# Altium PCB wearable.PcbDoc
Units mil, origin at the board's own origin, x right, y up, seen from the top; angles counter-clockwise.
Board outline 1357.64 x 1399.74 mil, 4 copper layers (TOP, GND, PWR, BOT), stack 23.756 mil thick; 38 components, 29 nets, 169 pads, 34 vias.
Unrouted connection lines stored in the file: 1.
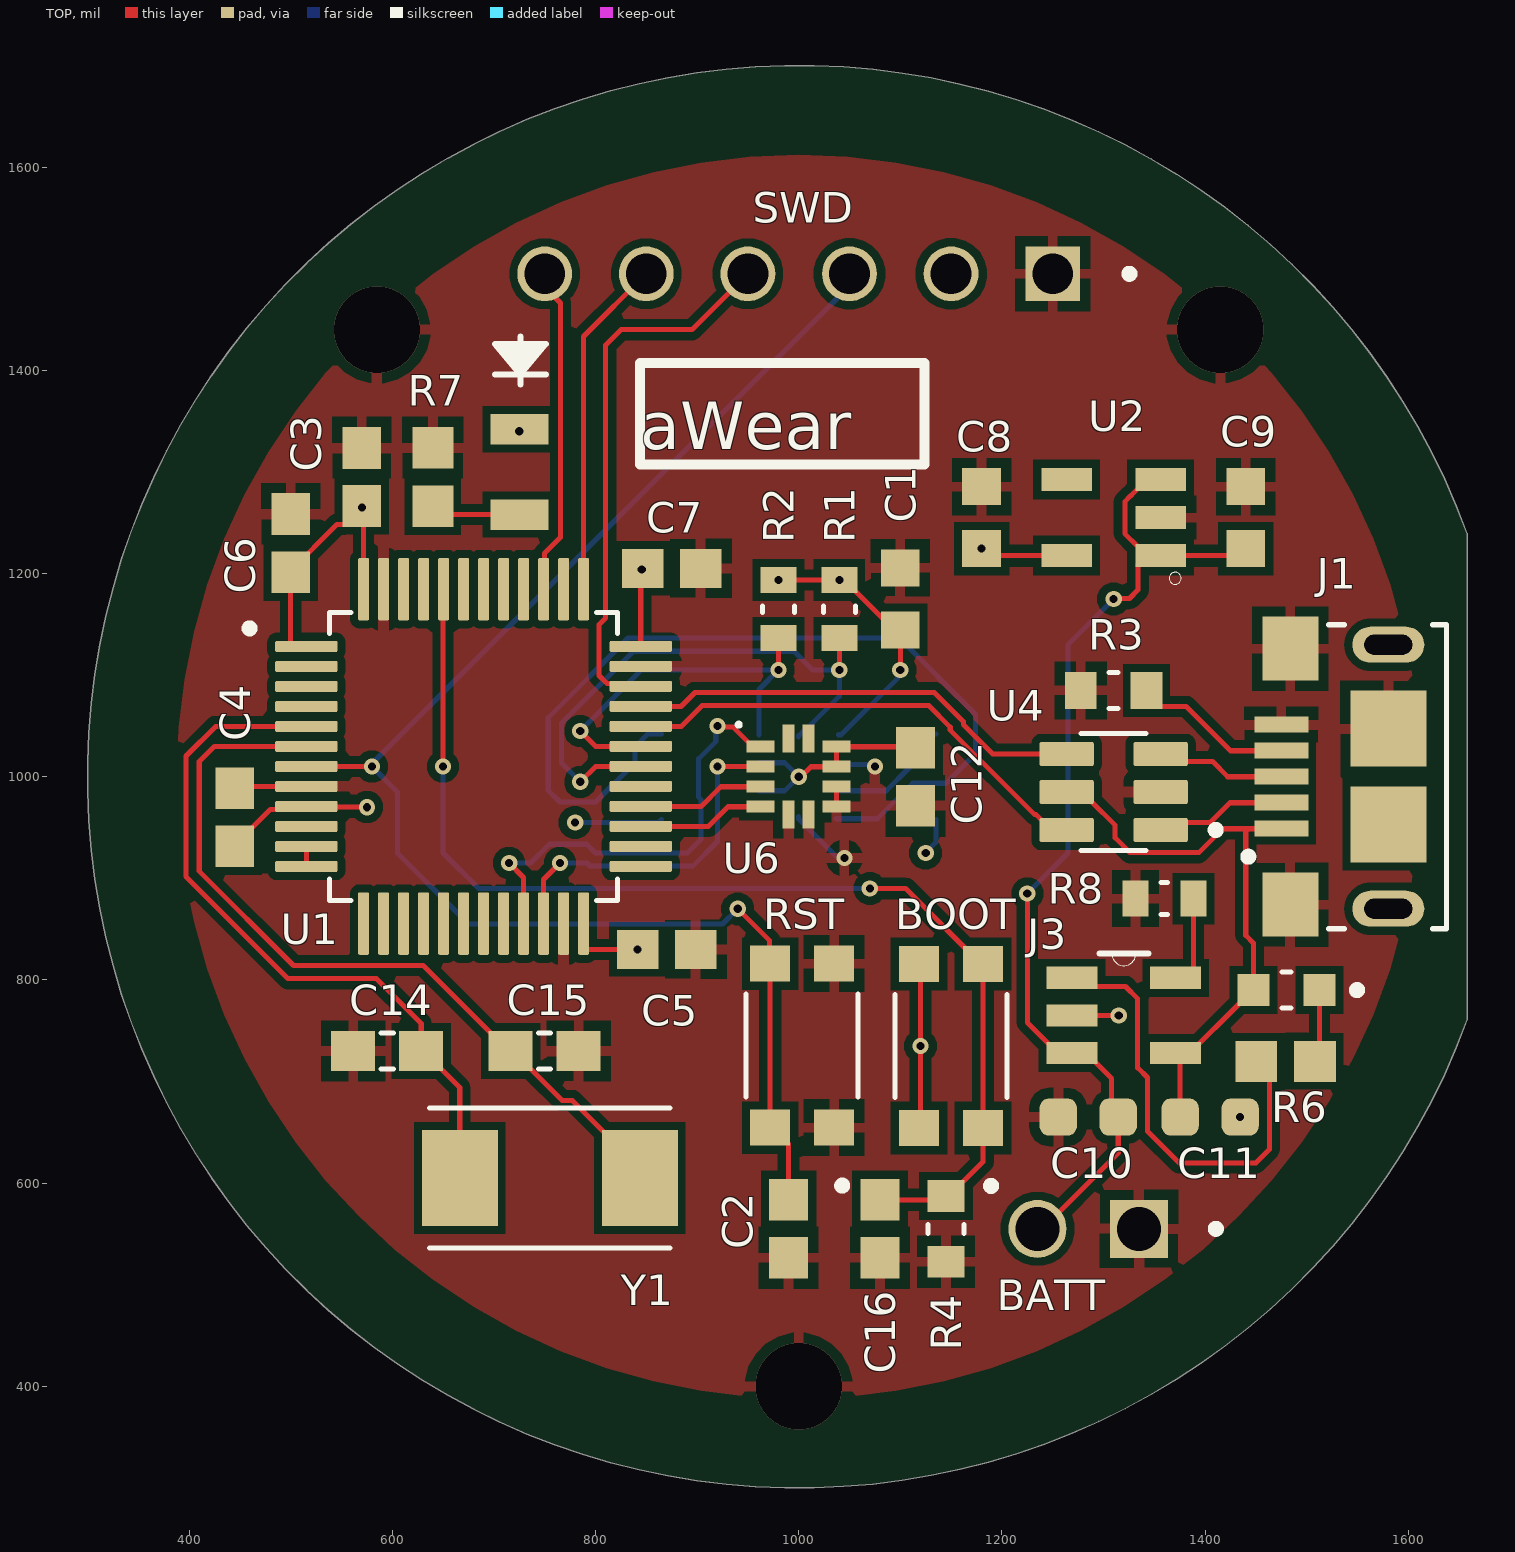
[diagram p0: TOP view]
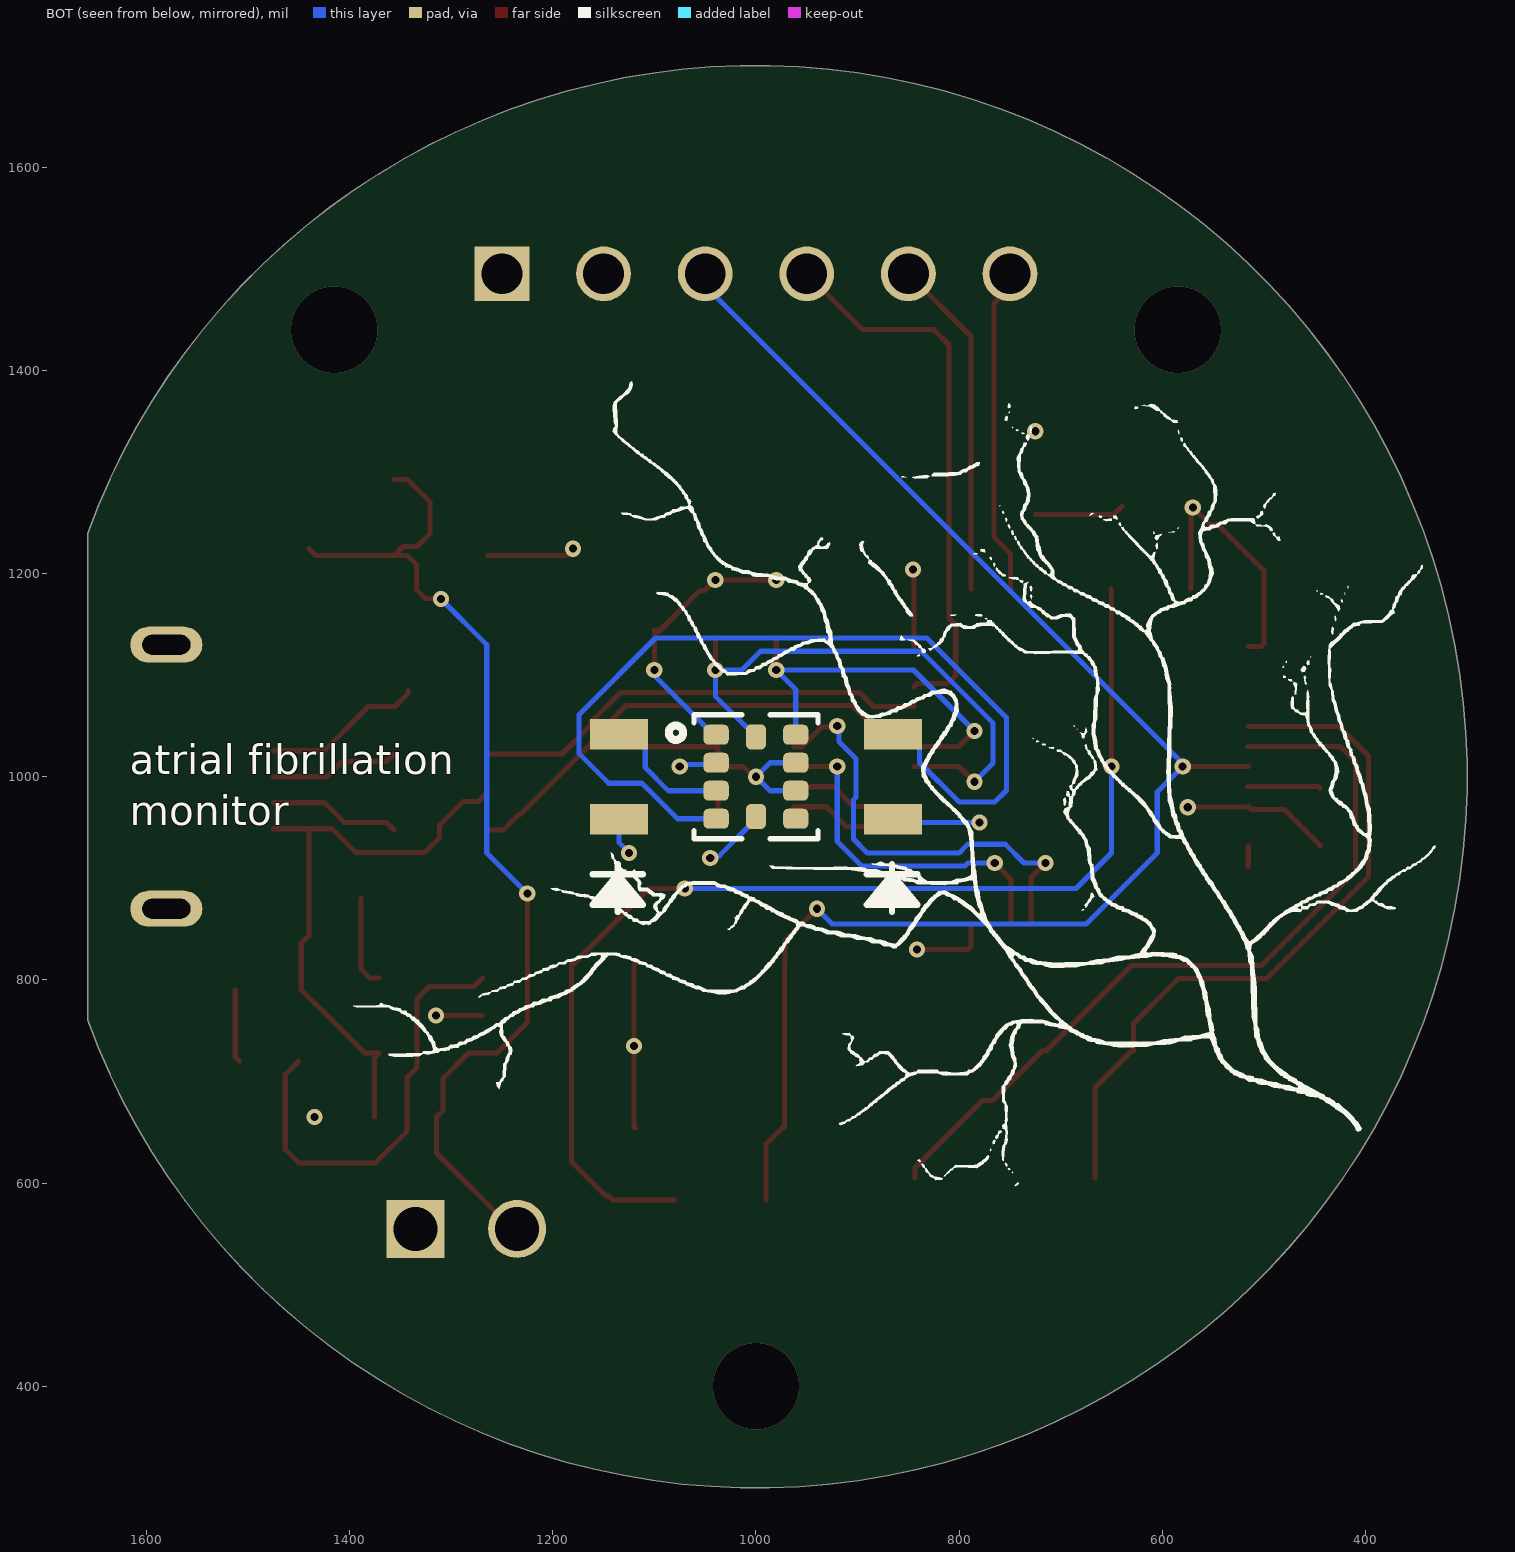
[diagram p1: BOT view, seen from below]
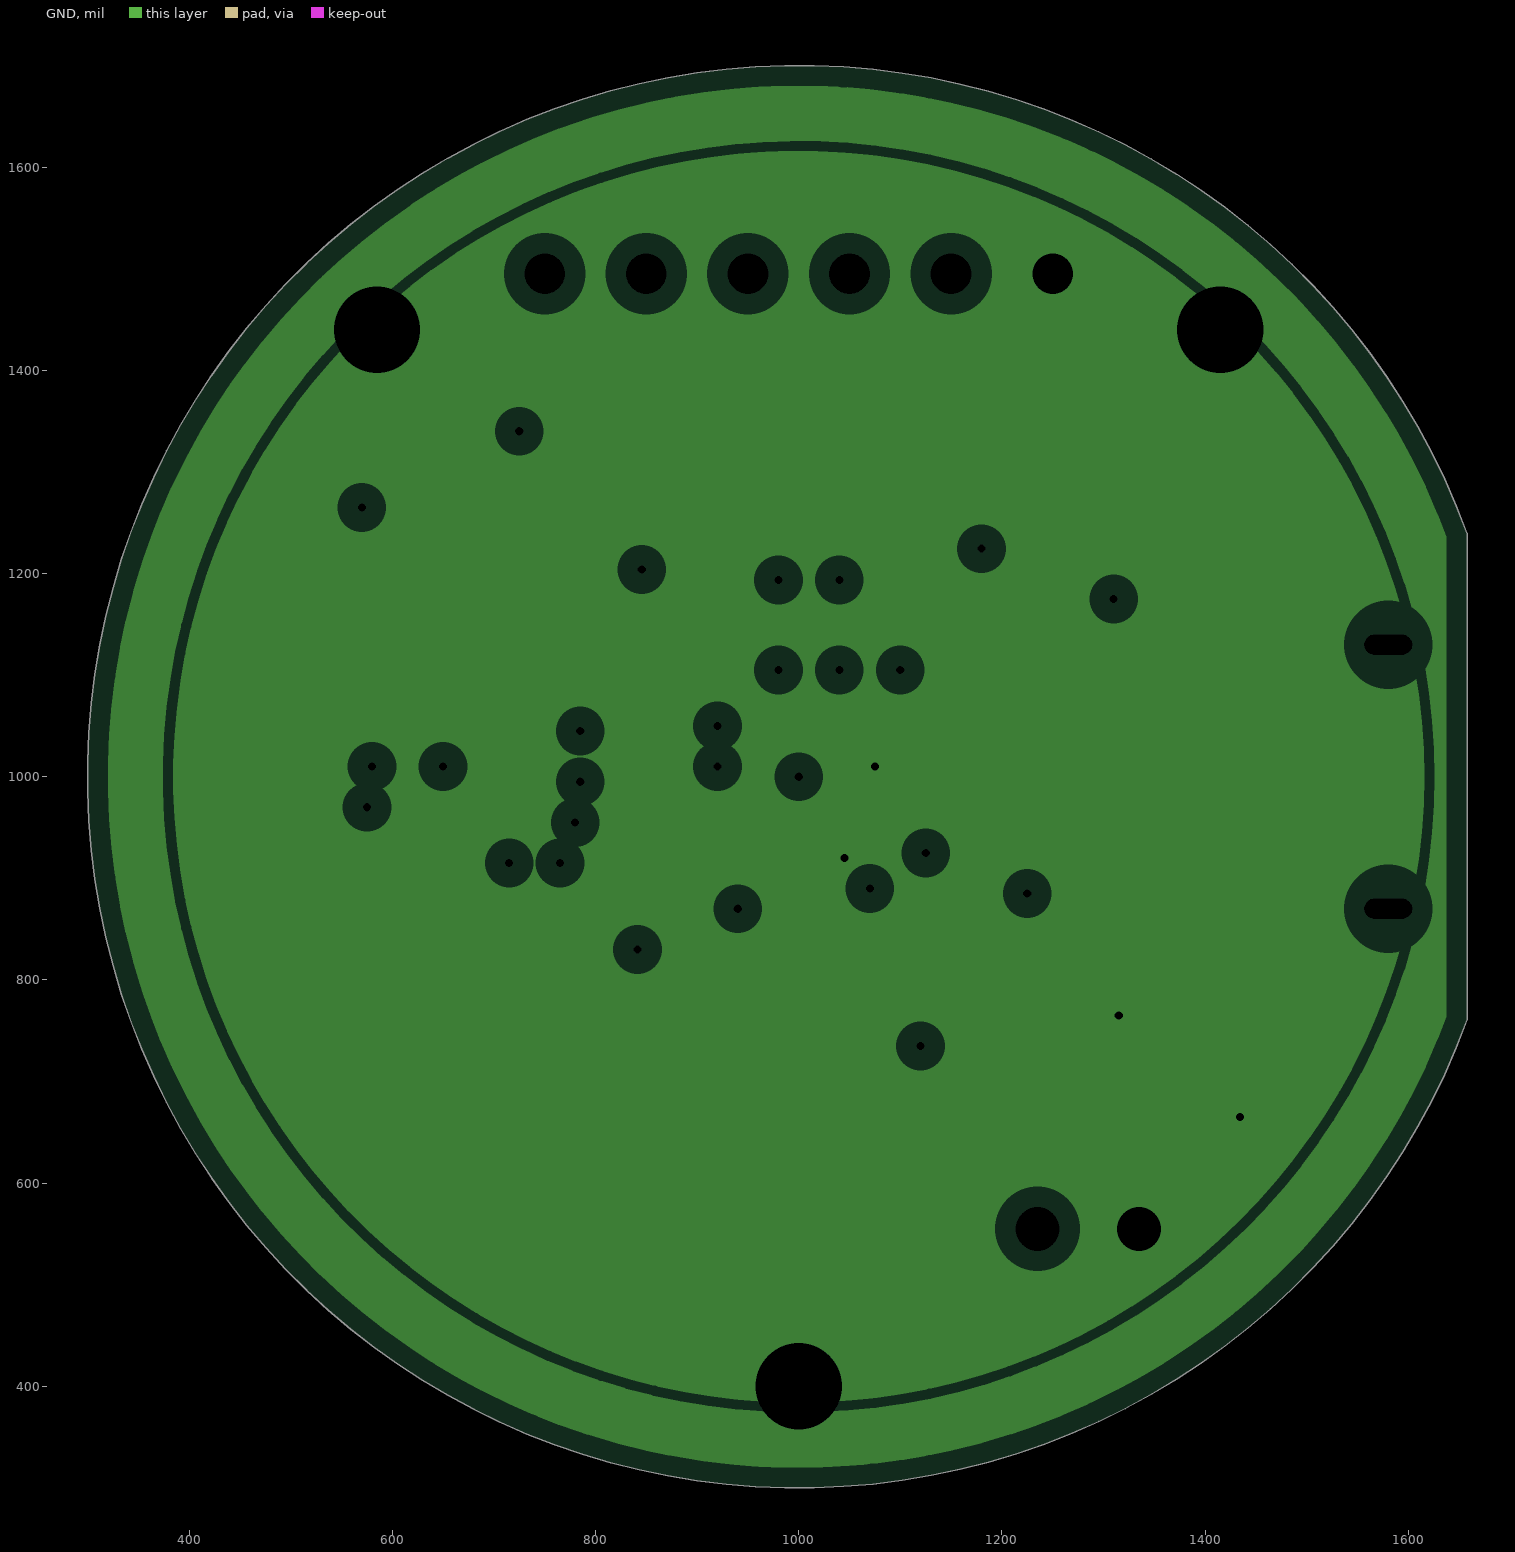
[diagram p2: GND, clearances drawn from the general rule]
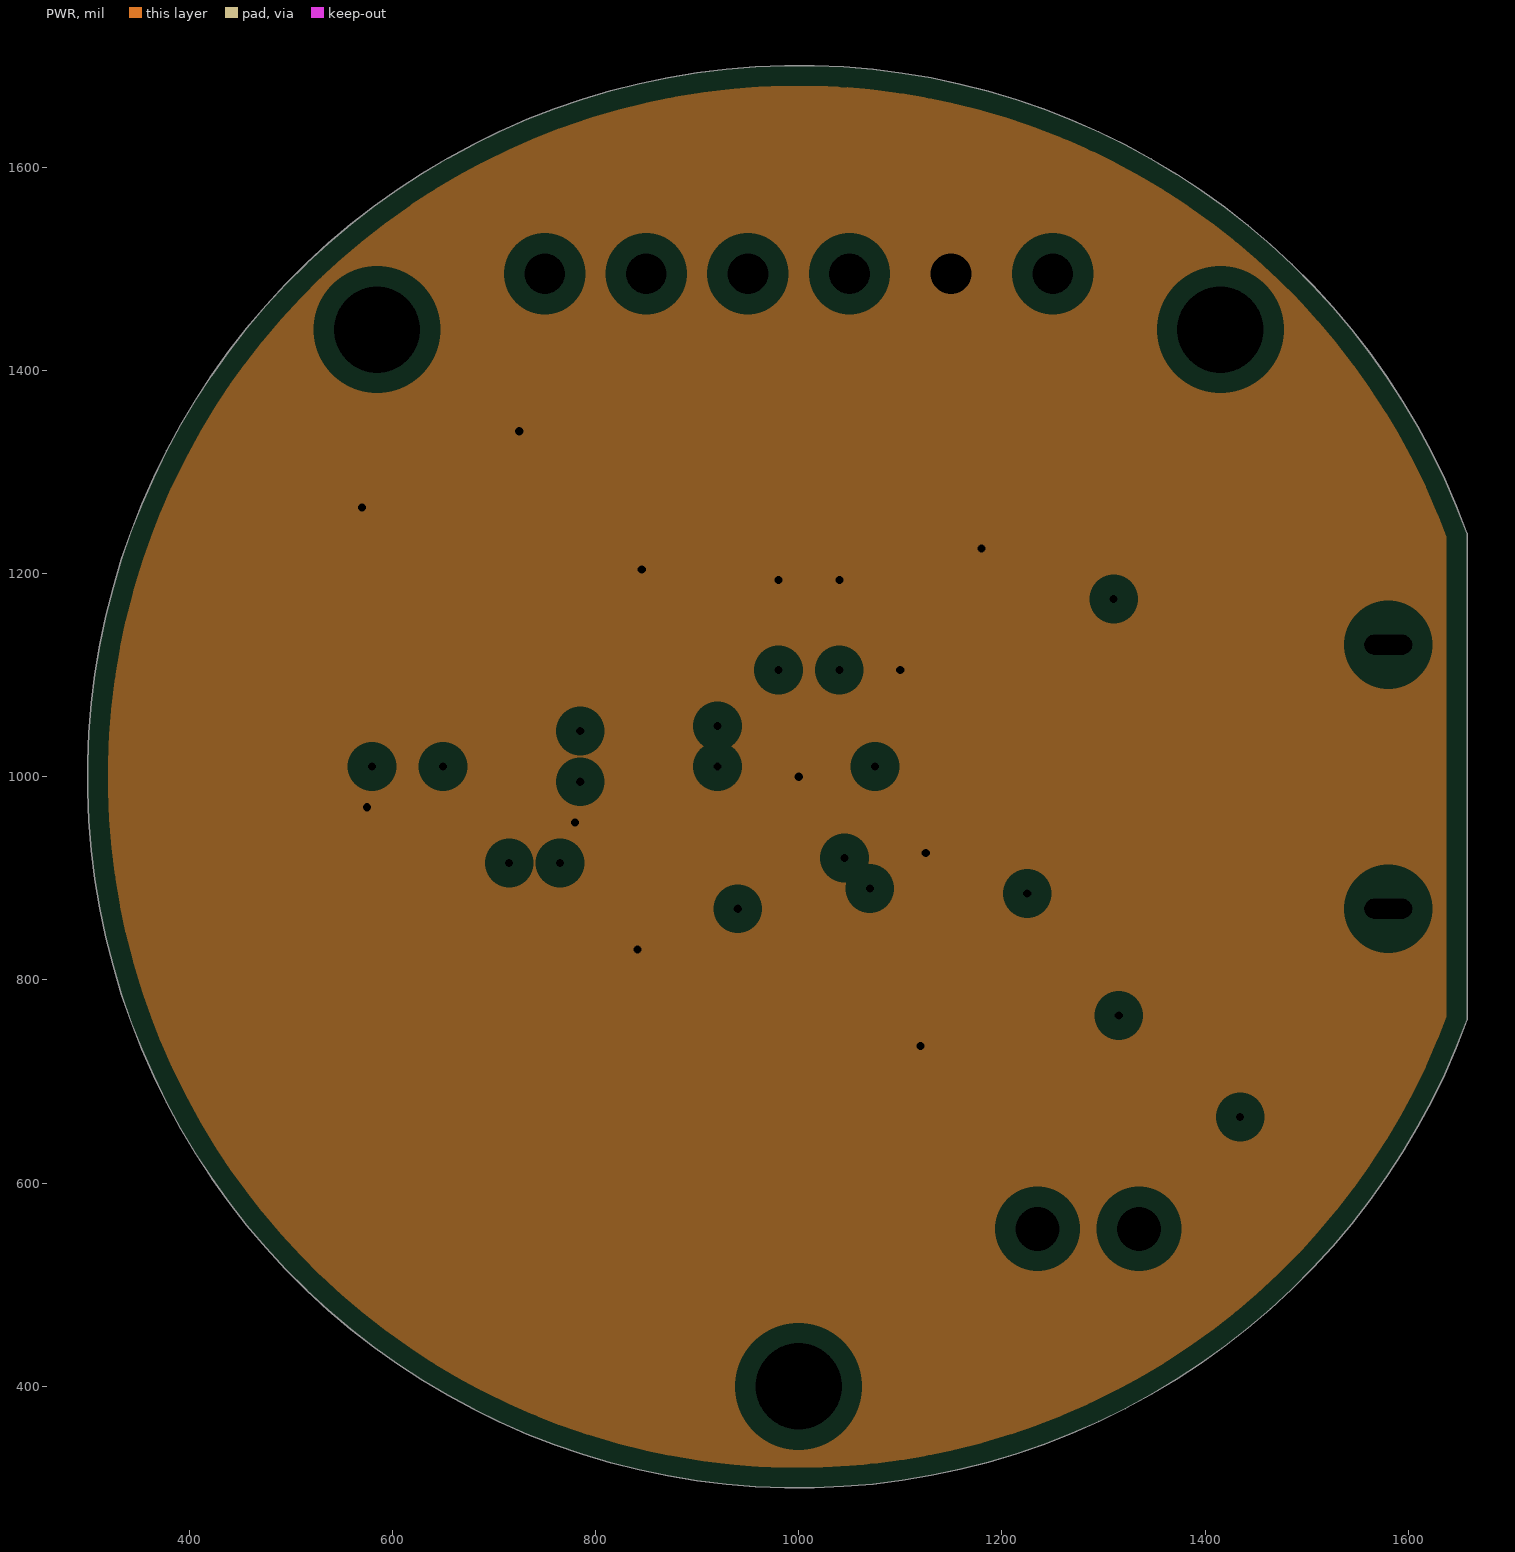
[diagram p3: PWR, clearances drawn from the general rule]

## Layer stack, top to bottom
Top Solder: solder mask 0.4, Solder Resist, Dk 3.5
TOP: signal copper 1.4
Dielectric 2: prepreg 2.8, PP-006, Dk 4.1
GND: plane copper 1.378, net GND
Dielectric 1: dielectric 12.6, FR-4, Dk 4.8
PWR: plane copper 1.378, net +3
Dielectric 3: prepreg 2.8, PP-006, Dk 4.1
BOT: signal copper 1.4
Bottom Solder: solder mask 0.4, Solder Resist, Dk 3.5

## Board outline
1657.78,760.59 cw(c1000,1000) 1657.78,1239.41

## Design rules (kind name [scope] priority, off if disabled: settings)
Clearance [All] p1: gap=8 ignorepadtopadclearanceinfootprint=TRUE except(5: SMDPad-SMDPad)
DiffPairsRouting [All] p1: maxlimit=10 minlimit=10 mostfreqgap=10 toplayer_minwidth=5 toplayer_maxwidth=15 toplayer_prefwidth=15 bottomlayer_minwidth=5 bottomlayer_maxwidth=15 bottomlayer_prefwidth=15 maxuncoupledlength=500
PlaneClearance [All] p1: clearance=20
PlaneConnect [All] p1: planeconnectstyle=Relief reliefexpansion=20 reliefentries=4 reliefconductorwidth=10 reliefairgap=10
PolygonConnect [All] p1: connectstyle=Relief reliefconductorwidth=10 reliefentries=4 polygonreliefangle="90 Angle" airgapwidth=10
RoutingVias [All] p1: holewidth=28 width=50 viastyle="Through Hole" minholewidth=28 minwidth=50 maxholewidth=28 maxwidth=50
SolderMaskExpansion [All] p1: expansion=4 istentingtop=FALSE
Width [All] p1: maxlimit=100 minlimit=5 preferedwidth=10
27 further rules are at their usual default settings.

## Classes and differential pairs
component class wearable: BOOT C1 C2 C3 C4 C5 C6 C7 C8 C9 C10 C11 C12 C14 C15 C16 J1 J3 R1 R2 R3 R4 R6 R7 R8 RST U1 U2 U4 U6 Y1
differential pair D: +D_P -D_N

## Components (designator, comment, footprint, x,y, rotation, side; value= is the part's Value field where it differs from the comment)
BATT "61300211121" WURTH_61300211121 1285,555 r180 top
BOOT "TL6330AF200Q" SW_TL6330AF200Q 1150,735 r90 top
C1 "1uF" CAPC1608X90N 1100,1175 r90 top
C2 "100 nF" CAPC1608X87N 990,555 r90 top
C3 "100 nF" CAPC1608X87N 570,1295 r270 top
C4 "100 nF" CAPC1608X87N 445,960 r270 top
C5 "100 nF" CAPC1608X87N 870,830 r180 top
C6 "100 nF" CAPC1608X87N 500,1230 r270 top
C7 "100 nF" CAPC1608X87N 875,1205 r180 top
C8 "1uF" CAPC1608X90N 1180,1255 r90 top
C9 "1uF" CAPC1608X90N 1440,1255 r90 top
C10 "4.7 uF" 0603-CAPC1608X9N 1285,665 r0 top
C11 "4.7 uF" 0603-CAPC1608X9N 1405,665 r180 top
C12 "100 nF" CAPC1608X87N 1115,1000 r90 top
C14 "18pF" CAPC1608X90 595,730 r180 top
C15 "18pF" CAPC1608X90 750,730 r0 top
C16 "100 nF" CAPC1608X87N 1080,555 r90 top
J1 "micro" FCI_10118193-0001LF 1580.32,1000 r90 top
J3 "MCP73831T-2ACI/OT" SOT95P280X145-5N 1320,765 r0 top
LED1 "right" LED_CMD17-21VGD_TR8 1135,1000 r90 bottom
LED2 "left" LED_CMD17-21VGD_TR8 865,1000 r90 bottom
LED3 "GOOD" LED_CMD17-21VGD_TR8 725,1300 r270 top
R1 "4.7k" RES_ERJPA3D4701V 1040,1165 r90 top
R2 "4.7k" RES_ERJPA3D4701V 980,1165 r90 top
R3 "100k" RESC1608X55N 1310,1085 r0 top
R4 "100k" RESC1608X55N 1145,555 r90 top
R6 "330R" RESC1607X60N 1479.21,719.81 r0 top
R7 "330R" RESC1607X60N 640,1295 r270 top
R8 "2k" RES_ERJS03F2001V 1360,880 r180 top
RST "TL6330AF200Q" SW_TL6330AF200Q 1003.39,735.31 r90 top
SWD "640456-6" TE_640456-6 1250,1495 r0 top
U1 "STM32L433CCT6" QFP50P900X900X160-48N 680,1020 r0 top
U2 "STLQ015M30R" SOT23P95_280X145-5N 1310,1255 r180 top
U3 "BH1790GLC-E2" PQFN70P280X280X100-10N 1000,1000 r180 bottom
U4 "USBLC6-2SC6Y" SOT95P280X145-6N 1310,985 r180 top
U6 "LIS2DE12TR" QFN50P200X200X100-12N 1000,1000 r0 top
Y1 "8MHz" XTAL_ECS-080-18-23G-JGN-TR 755,605 r0 top
? "STATUS" LED_SML-D12Y1WT86 1480,790 r180 top

## Footprints (in the part's own frame and the unit in brackets; to place one, negate y for a bottom-side part, rotate by r counter-clockwise, add the part's x,y. Pads: shape width x height; smd on the part's side, far side on the other; paste and mask are expansions set on the pad)
0603-CAPC1608X9N [mm]
  rrect50% 0.93x0.93 smd: 1(-0.75,0) 2(0.75,0)
  body extent -0.8,-0.4 0.8,0.4, height 0.9
CAPC1608X87N [mm]
  rect 1.04x0.97 smd: 1(-0.726,0) 2(0.726,0)
  body extent -0.8,-0.4 0.8,0.4, height 0.87
CAPC1608X90 [mm]
  rect 1.1x1 smd: 1(-0.85,0) 2(0.85,0)
  silkscreen extent -0.15,-0.45 0.15,0.45, body extent -0.8,-0.41 0.8,0.41, height 0.9
CAPC1608X90N [mm]
  rect 0.92x0.97 smd: 1(-0.775,0) 2(0.775,0)
  body extent -0.8,-0.4 0.8,0.4, height 0.95
FCI_10118193-0001LF [mm]
  rect 0.4x1.35 smd: 1(-1.3,2.675) 2(-0.65,2.675) 3(0,2.675) 4(0.65,2.675) 5(1.3,2.675)
  rect 1.6x1.4 smd: S1(-3.2,2.45) S2(3.2,2.45)
  rect 1.9x1.9 smd: S3(1.2,0) S4(-1.2,0)
  oval 0.9x1.8 hole 0.5 slot 1.2 at 90 deg: S5(-3.3,0) S6(3.3,0)
  round 0.5 hole 0.5 unplated: ""(-3.3,0) ""(3.3,0)
  silkscreen extent -3.8,-1.45 3.8,3.6, body extent -3.93,-2.76 3.93,2.95, height 2.85
LED_CMD17-21VGD_TR8 [mil]
  rect 30x57 smd: 1(-42,0) 2(42,0)
  silkscreen extent -133,-24 -86,26, body extent -40,-25 40,25, height 29
LED_SML-D12Y1WT86 [mm]
  rect 0.8x0.8 smd: A(0.825,0) C(-0.825,0)
  silkscreen extent -1.87,-0.45 0.11,0.45, body extent -0.8,-0.4 0.8,0.4, height 0.55
PQFN70P280X280X100-10N [mm]
  rrect50% 0.63x0.5 smd: 1(-0.995,1.05) 2(-0.995,0.35) 3(-0.995,-0.35) 4(-0.995,-1.05) 6(0.995,-1.05) 7(0.995,-0.35) 8(0.995,0.35) 9(0.995,1.05)
  rrect50% 0.5x0.63 smd: 5(0,-0.995) 10(0,0.995)
  silkscreen extent -2.18,-1.55 1.55,1.55, body extent -1.5,-1.5 1.5,1.5, height 1.01
QFN50P200X200X100-12N [mm]
  rect 0.7x0.3 smd: 1(-0.95,0.75) 2(-0.95,0.25) 3(-0.95,-0.25) 4(-0.95,-0.75) 7(0.95,-0.75) 8(0.95,-0.25) 9(0.95,0.25) 10(0.95,0.75)
  rect 0.3x0.7 smd: 5(-0.25,-0.95) 6(0.25,-0.95) 11(0.25,0.95) 12(-0.25,0.95)
  silkscreen extent -1.55,1.25 -1.45,1.35, body extent -1,-1 1,1, height 1
QFP50P900X900X160-48N [mm]
  rrect30% 1.56x0.28 smd: 1(-4.18,2.75) 2(-4.18,2.25) 3(-4.18,1.75) 4(-4.18,1.25) 5(-4.18,0.75) 6(-4.18,0.25) 7(-4.18,-0.25) 8(-4.18,-0.75) 9(-4.18,-1.25) 10(-4.18,-1.75) 11(-4.18,-2.25) 12(-4.18,-2.75) 25(4.18,-2.75) 26(4.18,-2.25) 27(4.18,-1.75) 28(4.18,-1.25) 29(4.18,-0.75) 30(4.18,-0.25) 31(4.18,0.25) 32(4.18,0.75) 33(4.18,1.25) 34(4.18,1.75) 35(4.18,2.25) 36(4.18,2.75)
  rrect30% 0.28x1.56 smd: 13(-2.75,-4.18) 14(-2.25,-4.18) 15(-1.75,-4.18) 16(-1.25,-4.18) 17(-0.75,-4.18) 18(-0.25,-4.18) 19(0.25,-4.18) 20(0.75,-4.18) 21(1.25,-4.18) 22(1.75,-4.18) 23(2.25,-4.18) 24(2.75,-4.18) 37(2.75,4.18) 38(2.25,4.18) 39(1.75,4.18) 40(1.25,4.18) 41(0.75,4.18) 42(0.25,4.18) 43(-0.25,4.18) 44(-0.75,4.18) 45(-1.25,4.18) 46(-1.75,4.18) 47(-2.25,4.18) 48(-2.75,4.18)
  silkscreen extent -5.7,-3.6 3.6,3.6, body extent -4.5,-4.5 4.5,4.5, height 1.56
RES_ERJPA3D4701V [mm]
  rect 0.65x0.9 smd: 1(-0.725,0) 2(0.725,0)
  silkscreen extent -0.08,-0.4 0.08,0.4, body extent -0.8,-0.4 0.8,0.4, height 0.45
RES_ERJS03F2001V [mm]
  rect 0.65x0.9 smd: 1(-0.725,0) 2(0.725,0)
  silkscreen extent -0.08,-0.4 0.08,0.4, body extent -0.8,-0.4 0.8,0.4, height 0.45
RESC1607X60N [mm]
  rect 1.04x1.02 smd: 1(-0.735,0) 2(0.735,0)
  body extent -0.8,-0.4 0.8,0.4, height 0.55
RESC1608X55N [mm]
  rect 0.79x0.93 smd: 1(-0.82,0) 2(0.82,0)
  silkscreen extent -0.11,-0.45 0.11,0.45, body extent -0.8,-0.4 0.8,0.4, height 0.55
SOT23P95_280X145-5N [mm]
  rect 1.26x0.58 smd: 1(-1.175,0.95) 2(-1.175,0) 3(-1.175,-0.95) 4(1.175,-0.95) 5(1.175,0.95)
  silkscreen extent -1.69,1.37 -1.39,1.67, body extent -1.4,-1.45 1.4,1.45, height 1.45
SOT95P280X145-5N [mil]
  rect 50x22 smd: 1(-51,37) 2(-51,0) 3(-51,-37) 4(51,-37) 5(51,37)
  silkscreen extent -24,49 24,61, body extent -53,-57 53,57, height 57
SOT95P280X145-6N [mm]
  rrect15% 1.36x0.6 smd: 1(-1.175,0.95) 2(-1.175,0) 3(-1.175,-0.95) 4(1.175,-0.95) 5(1.175,0) 6(1.175,0.95)
  silkscreen extent -2.65,-1.46 0.81,1.46, body extent -1.4,-1.46 1.4,1.46, height 1.42
SW_TL6330AF200Q [mm]
  rect 0.9x1 smd: 1(-2.05,-0.8) 2(2.05,-0.8) 3(-2.05,0.8) 4(2.05,0.8)
  silkscreen extent -3.6,-1.4 1.29,1.4, body extent -2.3,-1.4 2.3,1.4, height 1.9
TE_640456-6 [mm]
  rect 1.37x1.37 hole 1.02: 1(0,0)
  round 1.37 hole 1.02: 2(-2.54,0) 3(-5.08,0) 4(-7.62,0) 5(-10.16,0) 6(-12.7,0)
  silkscreen extent 1.82,-0.1 2.02,0.1
WURTH_61300211121 [mm]
  rect 1.45x1.45 hole 1.1: 01(-1.27,0)
  round 1.45 hole 1.1: 02(1.27,0)
  silkscreen extent -3.29,-0.1 -3.09,0.1
XTAL_ECS-080-18-23G-JGN-TR [mm]
  rect 1.9x2.4 smd: 1(-2.25,0) 2(2.25,0)
  silkscreen extent -3,-1.75 3,1.75, body extent -3,-1.75 3,1.75, height 1.2

## Part data
BATT BOOT RST U1 U4: Package=None, Availability=Unavailable, Price=None
  BATT: MF="{'manufacturer': u'Wurth Electronics'}", MP=61300211121
  BOOT RST: MF="{'manufacturer': u'E-Switch'}", MP=TL6330AF200Q
  U1: MF="{'manufacturer': u'STMicroelectronics'}", MP=STM32L433CCT6
  U4: MF="{'manufacturer': u'STMicroelectronics'}", MP=USBLC6-2SC6Y
C1 C8 C9: library part C0603C105K8RACTU, "1.0UF 10V 10% 0603", Package=None, Availability=Unavailable, MF="{'manufacturer': u'KEMET'}", MP=C0603C105K8RACTU, Price=None
C2 C3 C4 C5 C6 C7 C12 C16: library part MC0603B104J160CT, "Product Range:MULTICOMP - MC Series C; ; Product Range:MULTICOMP - MC Series; Capacitance:0.1ÂµF; Capacitance Tolerance:Â± 5%; Dielectric Characteristic:X7R; Voltage Rating:16V; Capacitor Case Style:0603 ^1608 Metric]; Operating Temperature Min:-55Â°C; Packaging:Cut Tape", Package=None, Availability=Unavailable, MF="{'manufacturer': u'Multicomp'}", MP=MC0603B104J160CT, Price=None
C10 C11: library part CC0603KRX5R6BB475, "CAP CER 4.7UF 10V X5R 0603 Â±10%  <p> <a href=\"https://www.digikey.com/product-detail/en/yageo/CC0603KRX5R6BB475/311-1455-1-ND/2833761\">Digikey</a></p> <a href=\"https://www.yageo.com/upload/media/product/productsearch/datasheet/mlcc/UPY-GPHC_X5R_4V-to-50V_25.pdf\">Datasheet</a>", Package=None, Availability=Unavailable, MF="{'manufacturer': u'Yageo'}", MP=CC0603KRX5R6BB475, Price=None
C14 C15: library part CC0603JRNPO0BN180, "Cap Ceramic 18pF 100V C0G 5% Pad SMD 0603 125C T/R", Package=None, Availability=Unavailable, MF="{'manufacturer': u'Yageo'}", MP=CC0603JRNPO0BN180, Price=None
J1: library part 10118193-0001LF, "Micro USB B Type Receptacle", Package=None, Availability=Unavailable, MF="{'manufacturer': u'FCI'}", MP=10118193-0001LF, Price=None
J3: "Charge Management Controller", Package=None, Availability=Unavailable, MF="{'manufacturer': u'Microchip'}", MP=MCP73831T-2ACI-OT, Price=None
LED1 LED2 LED3: library part CMD17-21VGD_TR8, "LED, GREEN, 7MCD, 570NM", Package=None, Availability=Unavailable, MF="{'manufacturer': u'VCC'}", MP=CMD17-21VGD-TR8, Price=None
R1 R2: library part ERJPA3D4701V, Package=None, Availability=Unavailable, MF="{'manufacturer': u'Panasonic'}", MP=ERJPA3D4701V, Price=None
R3 R4: library part RT0603BRB07100KL, Package=None, Availability=Unavailable, MF="{'manufacturer': u'Yageo'}", MP=RT0603BRB07100KL, Price=None
R6 R7: library part RC0603FR-07330RL, "Resistor: thick film; SMD; 0603; 330Î©; 100mW; Â±1%; -55Ã·155Â°C", Package=None, Availability=Unavailable, MF="{'manufacturer': u'Yageo'}", MP=RC0603FR-07330RL, Price=None
R8: library part ERJS03F2001V, Package=None, Availability=Unavailable, MF="{'manufacturer': u'Panasonic'}", MP=ERJS03F2001V, Price=None
SWD: "220P MTA100 HDR ASSY SQ SPCL", Package=None, Availability=Unavailable, MF="{'manufacturer': u'TE Connectivity'}", MP=640456-6, Price=None
U2: "150 mA - ultra low quiescent current linear voltage regulator", Package=None, Availability=Unavailable, MF="{'manufacturer': u'STMicroelectronics'}", MP=STLQ015M30R, Price=None
U3: "Human Pulse biometric sensor WLGA010V28", Package=None, Availability=Unavailable, MF="{'manufacturer': u'Rohm'}", MP=BH1790GLC-E2, Price=None
U6: "MEMS digital output motion sensor: ultra low-power high performance 3-axes femto accelerometer", Package=None, Availability=Unavailable, MF="{'manufacturer': u'STMicroelectronics'}", MP=LIS2DE12TR, Price=None
Y1: library part ECS-080-18-23G-JGN-TR, "compact SMD Crystal.", Package=None, Availability=Unavailable, MF="{'manufacturer': u'ECS Inc.'}", MP=ECS-080-18-23G-JGN-TR, Price=None
?: library part SML-D12U1WT86, "RED CHIP LED MINI-MOLD", Package=None, Availability=Unavailable, MF="{'manufacturer': u'Rohm'}", MP=SML-D12U1WT86, Price=None

## Via types
v1: diameter 16, hole 8, TOP to BOT, 31 vias
v2: diameter 85, hole 85, TOP to BOT, 3 vias

## Nets (pads, with @x,y where several pads share a name; then routed paths per layer and width w, separated by ;. In a path a pad name is that pad's centre, name@x,y a point inside that pad or via, vN(x,y) a via of type N, cw(c..) or ccw(c..) an arc to the next point about the centre after c; other vN are vias at no path point)
+3: BOOT.3 BOOT.4 C1.1 C3.2 C4.2 C5.2 C6.2 C7.2 C8.1 C12.2 LED1.1 LED2.1 LED3.1 R1.2 R2.2 SWD.2 U1.1 U1.9 U1.24 U1.36 U1.48 U2.5 U3.1 U3.7 U3.8 U6.9 U6.10 | length 1438.8
  TOP w5: C4.2 445,932.8 479.98,967.78 512.42,967.78 U1.9 515.83,970.39 574.61,970.39 v1(575,970) ; U1.1 503.01,1128.27 500,1131.28 C6.2 500,1202.8 545.65,1248.44 553.44,1248.44 v1(570,1265) ; U1.48 C3.2@571.73,1264.68 ; U1.24 788.27,833.01 791.28,830 v1(841.42,830) ; U1.36 844.57,1203.15 C7.2 ; v1(980,1193.54) v1(1040,1193.54) 1050.3,1183.25 1055.26,1183.25 1095.51,1142.99 1097.01,1144.49 C1.1 v1(1100,1105) ; v1(1000,1000) 1002.24,1000 1012.08,1009.84 U6.9 U6.10 1114.06,1029.53 C12.2 ; BOOT.3 1120,655.79 v1(1120,735) 1120,814.21 BOOT.4 ; v1(1180,1224.49) 1186.89,1217.6 U2.5
  BOT w5: v1(780,955) 862,955 LED2.1 ; U3.7 986.22,986.22 v1(1000,1000) 986.22,1013.78 U3.8 ; U3.1 1041.73,1041.34 1097.9,1097.5 1097.9,1102.9 v1(1100,1105) ; v1(1125,925) 1125,925.5 1135,935.5 LED1.1
  other v1: 845.49,1204.07 725,1340
BOOT0: BOOT.1 BOOT.2 C16.2 R4.2 U1.44 | length 1148.2
  TOP w5: v1(650,1010) 650,1184.09 U1.44 ; v1(1070,890) 1105.24,890 1179.53,815.71 BOOT.2 BOOT.1 1181.5,621.02 1147.76,587.28 R4.2 1141.3,583.58 C16.2
  BOT w5: v1(650,1010) 650,925 685,890 v1(1070,890)
D_N: J1.2 U4.1 | length 129.8
  TOP w5: U4.1 1363.8,955.14 1405.21,955.14 1424.48,974.41 J1.2
D_P: J1.3 U4.3 | length 128
  TOP w5: U4.3 1363.8,1014.86 1407.41,1014.86 1422.27,1000 J1.3
GND: BATT.01 C1.2 C2.1 C3.1 C4.1 C5.1 C6.1 C7.1 C8.2 C9.2 C10.1 C11.1 C12.1 C14.2 C15.2 C16.1 J1.5 J1.S1 J1.S2 J1.S3 J3.2 R3.1 R4.1 R7.1 R8.2 RST.1 RST.2 SWD.1 U1.8 U1.23 U1.35 U1.47 U2.2 U3.2 U3.5 U4.2 U6.5 U6.6 U6.7 U6.8 | length 237.7
  TOP w5: C4.1 446.89,990.47 U1.8 ; U6.7 U6.8 ; J3.2 v1(1315,765)
  BOT w5: U3.5 1000,958.27 1036.16,922.1 1042.9,922.1 v1(1045,920) ; U3.2 1041.06,1011.89 1073.11,1011.89 v1(1075,1010)
  other v1: 1434.53,665
  other v2: 1000,400 585,1440 1415,1440
I2C1_SCL: R1.1 U1.30 U3.10 | length 556.3
  TOP w5: v1(785,995) 800.16,1010.16 U1.30 ; v1(1040,1105) R1.1
  BOT w5: v1(785,995) 766.5,1013.5 766.5,1052.66 837.34,1123.5 995.43,1123.5 1013.93,1105 v1(1040,1105) 1040,1079.17 1009.9,1049.07 1008.65,1049.07 1000,1040.42 U3.10
I2C1_SDA: R2.1 U1.31 U3.9 | length 388.8
  TOP w5: v1(785,1045) 800.16,1029.84 U1.31 ; v1(980,1105) R2.1
  BOT w5: v1(785,1045) 845,1105 v1(980,1105) 960.83,1085.83 U3.9
IMU_CS: U1.22 U6.2 | length 348.9
  TOP w5: U1.22 748.9,898.9 v1(765,915) ; v1(920,1010) 920.08,1009.92 962.52,1009.92 U6.2
  BOT w5: v1(765,915) 791.62,915 794.62,912 895.73,912 920,936.27 v1(920,1010)
Net_C: ?.C R6.2 | length 72
  TOP w5: R6.2 1512.48,724.14 ?.C
NetJ1_4: J1.4 R3.2 | length 158.9
  TOP w5: R3.2 1342.28,1082.24 1355.33,1069.19 1381.33,1069.19 1424.93,1025.59 J1.4
NetLED1_2: LED1.2 U3.3 | length 130.9
  BOT w5: U3.3 1086.22,986.22 1109,1009 1109,1029.5 1121.5,1042 LED1.2
NetLED2_2: LED2.2 U3.4 | length 911.4
  BOT w5: LED2.2 851.5,1042 839,1029.5 839,1014 800,975 765,975 753.5,986.5 753.5,1058.05 831.95,1136.5 1098.85,1136.5 1174,1061.35 1174,1022.65 1144.93,993.58 1112.23,993.58 1077.31,958.66 U3.4 U3.4@1036.61,958.66
NetLED3_2: LED3.2 R7.2 | length 88.3
  TOP w5: R7.2 648.06,1258 LED3.2
NetU1_11: U1.11 U1.12 | length 19.7
  TOP w5: U1.12 U1.11
nRST: C2.2 RST.3 RST.4 SWD.3 U1.7 | length 1518.2
  TOP w5: U1.7 515.51,1010.08 579.92,1010.08 v1(580,1010) ; v1(940,870) 971.44,838.56 971.44,816.48 RST.4 RST.3 973.86,654.61 990,638.47 C2.2
  BOT w5: v1(940,870) 925,855 675,855 605,925 605,985 v1(580,1010) 580,1012.98 1050,1482.98 SWD.3
PROG: J3.5 R8.1 | length 90.6
  TOP w5: J3.5 1380.04,802 1388.54,810.5 R8.1
SPI2_MISO: U1.28 U6.3 | length 126.1
  TOP w5: U1.28 904,970.79 923.37,990.16 U6.3
SPI2_MOSI: U1.27 U6.4 | length 126.1
  TOP w5: U1.27 911.1,951.1 930.47,970.47 U6.4
SPI2_SCK: U1.21 U6.1 | length 442.4
  TOP w5: v1(715,915) 729.21,900.79 U1.21 ; v1(920,1050) 921.25,1048.75 935.5,1048.75 954.72,1029.53 U6.1
  BOT w5: v1(715,915) 736.07,915 754.57,933.5 791.5,933.5 800,925 890.35,925 904,938.65 904,977.35 901.5,979.85 901.5,1017.66 918.34,1034.5 918.34,1048.34 v1(920,1050)
STAT: J3.1 R6.1 | length 437.9
  TOP w5: J3.1 1277.5,793.5 1321.64,793.5 1333.61,781.53 1333.61,713.58 1343.33,703.85 1343.33,651.04 1374.37,620 1450,620 1463.33,633.33 1463.33,706.75 R6.1
SWC: SWD.5 U1.37 | length 336
  TOP w5: U1.37 788.27,1433.27 SWD.5
SWD: SWD.4 U1.34 | length 542.7
  TOP w5: U1.34 841.56,1091.91 811.14,1091.91 803.36,1099.69 803.36,1149.56 810,1156.2 810,1425 825,1440 895,1440 SWD.4
SWO: SWD.6 U1.39 | length 323.8
  TOP w5: U1.39 749.66,1185.33 749.66,1219.66 765.59,1235.59 765.59,1466.17 750,1481.76 SWD.6
USB: ?.A C11.2 J1.1 J3.4 U4.5 | length 583.1
  TOP w5: U4.5 1273.05,975.69 1288.04,975.69 1311.52,952.21 1311.52,939.94 1326.18,925.29 1393.74,925.29 1417.27,948.82 1442.93,948.82 ; C11.2 1375.47,723.53 J3.4 1385,728 1433.75,776.75 1434.27,776.75 ?.A 1447.52,836.45 1440,843.97 1440,945.89 1442.93,948.82 ; J1.1 1442.93,948.82
USB_N: U1.32 U4.6 | length 480.1
  TOP w5: U1.32 884.53,1049.53 905,1070 1128,1070 1149.18,1048.82 1149.18,1045.82 1232.31,962.69 1233.69,962.69 1248.78,947.6 U4.6
USB_P: U1.33 U4.4 | length 451.7
  TOP w5: U1.33 884.21,1069.21 898,1083 1133.38,1083 1162.18,1054.2 1162.18,1051.2 1190.98,1022.4 U4.4
VBAT: BATT.02 C9.1 C10.2 J3.3 U2.1 U2.3 | length 1029.6
  TOP w5: v1(1225,885) 1225,758 1255,728 J3.3 1283,728 1307.87,703.13 1307.87,671.65 C10.2 1314.53,629.53 1240,555 BATT.02 ; v1(1310,1175) 1310.5,1175.5 1325.5,1175.5 1333.96,1183.96 1333.96,1208.68 1342.87,1217.6 U2.1 ; U2.3 1342.87,1292.4 1327.39,1276.92 1327.11,1276.92 1320.96,1270.77 1320.96,1239.23 1333.67,1226.52 1347.34,1226.52 U2.1 ; C9.1 1433.11,1217.6 U2.1
  BOT w5: v1(1225,885) 1265,925 1265,1130 v1(1310,1175)
XIN: C14.1 U1.5 Y1.1 | length 709.6
  TOP w5: U1.5 426.14,1049.53 397,1020.38 397,901.62 497.39,801.22 584.43,801.22 628.46,757.19 C14.1 630.43,730 666.42,694.02 Y1.1
XOUT: C15.1 U1.6 Y1.2 | length 784
  TOP w5: U1.6 424.84,1029.84 410,1015 410,907 502.78,814.22 630.34,814.22 714.57,730 C15.1 718.5,730 767.22,681.28 777.15,681.28 843.58,614.84 Y1.2
pads on no net: J1. J1.S4 J1.S5 J1.S6 U1.2 U1.3 U1.4 U1.10 U1.13 U1.14 U1.15 U1.16 U1.17 U1.18 U1.19 U1.20 U1.25 U1.26 U1.29 U1.38 U1.40 U1.41 U1.42 U1.43 U1.45 U1.46 U2.4 U3.6 U6.11 U6.12

## Polygon pours and split planes (outlines as drawn)
GND on TOP "NONET_L-01_P-001" (solid, remove dead copper, pour order 0): 300,1700 300,300 1650,300 1650,1700
GND on GND (split plane): 166 vertices, not listed, extent 320,320 1637.69,1680
GND on GND (split plane): 177 vertices, not listed, extent 384.16,384.16 1615.84,1615.84
+3 on PWR (split plane): 166 vertices, not listed, extent 320,320 1637.69,1680

## Other copper
GND (plane layer: these items are gaps in the copper):
  circle w10: c1000,1000 r620.85

## Silkscreen, mask and mechanical layers (free items; w line width, h text height)
Top Overlay:
  lines w10: 843.68,1307.16 843.68,1407.16 1123.68,1407.16 1123.68,1307.16 843.68,1307.16
  text "aWear" at 844.2,1307.16 h80
Bottom Overlay:
  drawing of 89 lines, arcs and shapes, not listed
  text "atrial fibrillation / monitor" at 1616.25,942.5 h50

## Text inside footprints (layer, text, board x,y; h text height)
J1: Mechanical 13 "PCB END" at 1631.5,1187.01 h16 r90